# EAGLE board proto_shield_v5 (EAGLE 4.13)
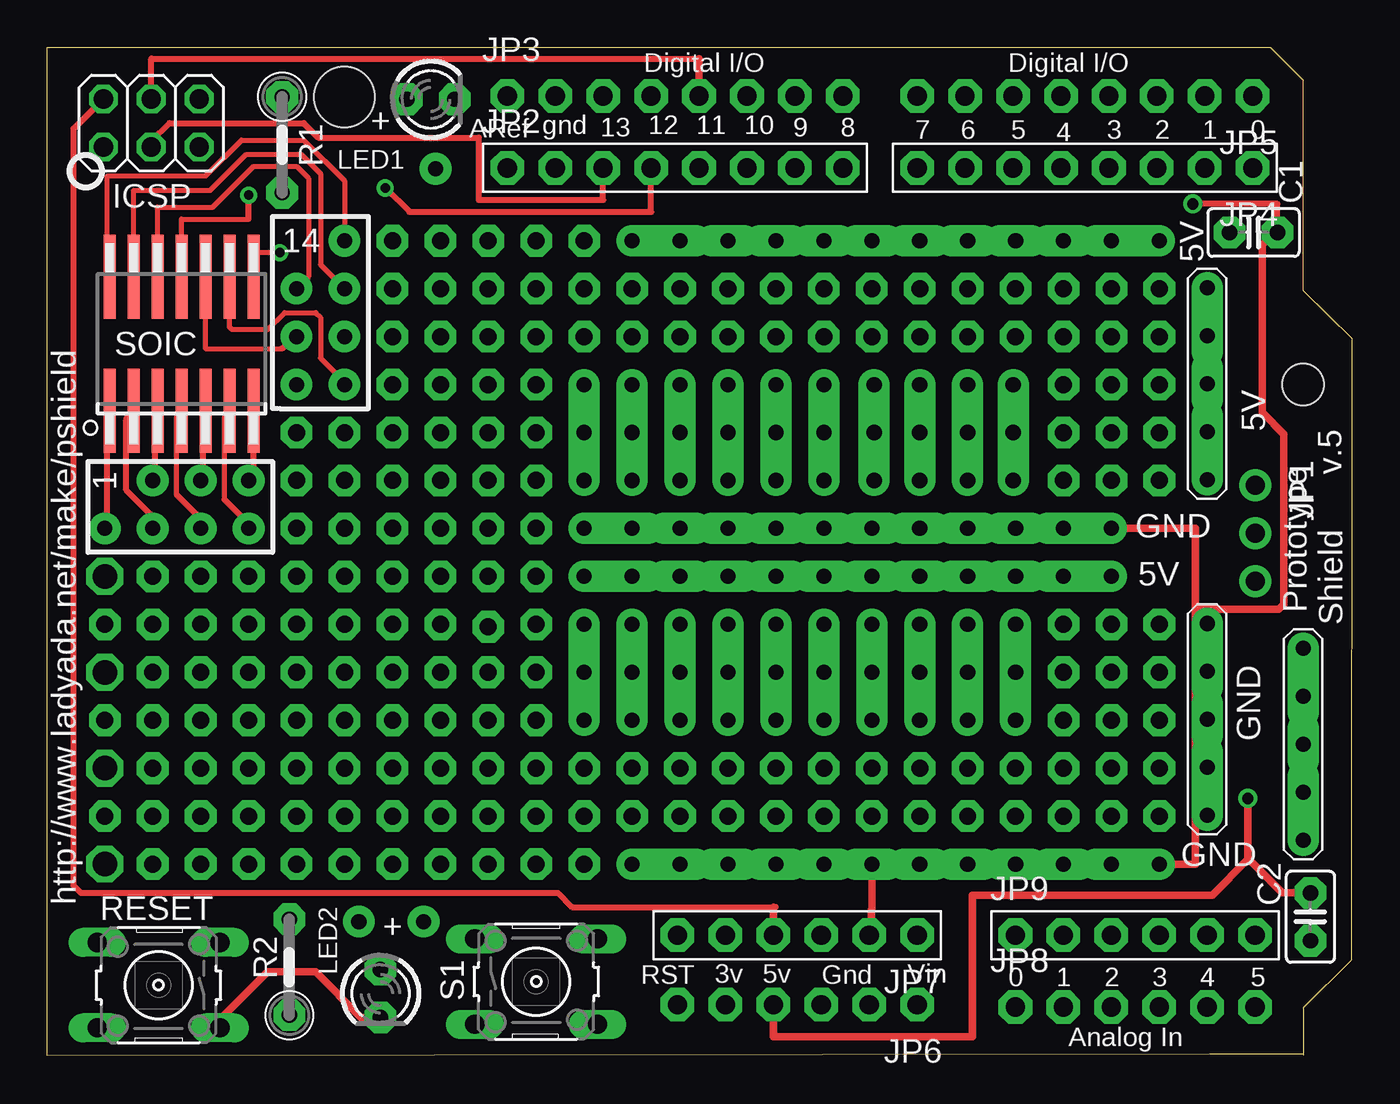
[diagram p0: board, top side]
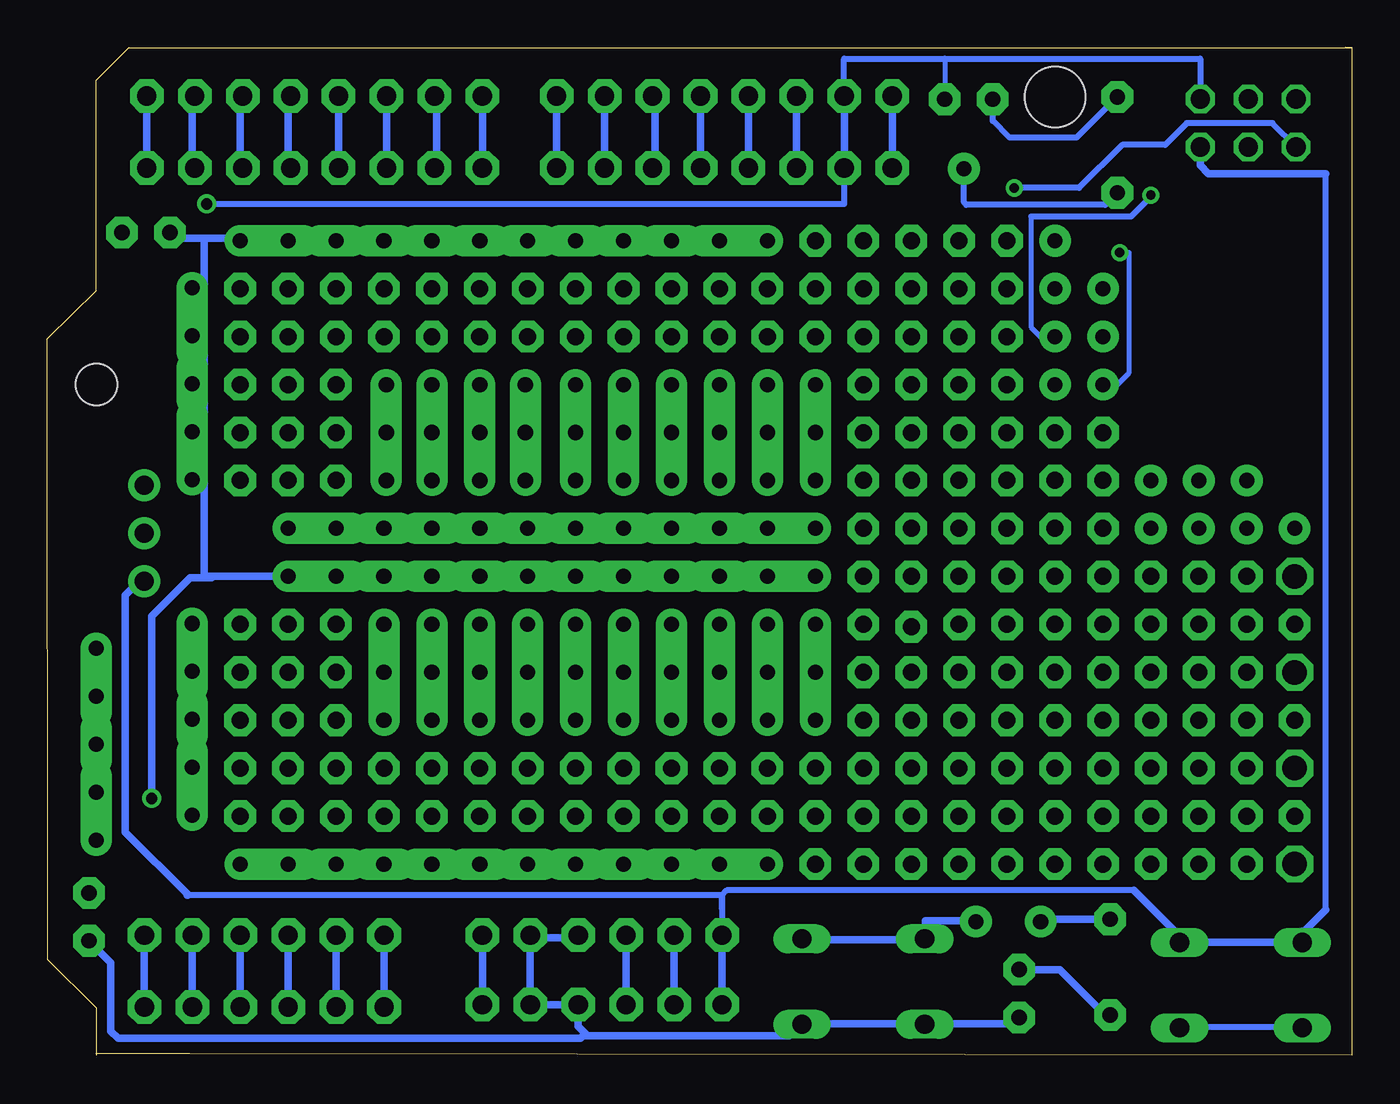
[diagram p1: board, bottom side, seen from below]

Size 69.16 x 53.39 mm. Coordinates in mm from the lower left corner, seen from the top.
Outline: 0,53.35 64.83,53.35 66.55,51.63 66.55,40.49 69.16,37.95 69.13,5.05
Outline: 0,53.35 0.38,53.39
Outline: 69.13,5.05 69.13,5.05
Outline: 69.13,5.05 66.55,2.5 66.57,0
Outline: 0,53.35 0,0 61.6,0.09 66.58,0.08
Copper layers (1*16): Top 0.035mm / dielectric 1.5mm / Bottom 0.035mm
Design rules "default": minimum track width 10mil, minimum drill 19mil, track to track 10mil, track to pad 10mil, pad to pad 0mil, via to via 10mil, smd to smd 0mil, copper to edge 10mil, drill to drill 8mil, minimum pad ring 10mil, minimum via ring 8mil, stop-mask expansion 4mil, vias tented up to drill 0mil, thermal gap 10mil
Holes 3.2 mm at 15.75,50.76
Holes 2.2 mm at 66.55,35.52

## Footprints (pad centres in the part's own frame; a part is rotated, then mirrored left to right if it is on the bottom)
C025-025X050 = drill 0.813 pad 1.676 octagon: 1 -1.27,0; 2 1.27,0
12-STRIP = drill 0.8 pad 1.676 offset: P$1 0,0; P$11 27.94,0 | drill 0.8 pad 1.676 long: P$2 2.54,0; P$3 5.08,0; P$4 7.62,0; P$5 10.16,0; P$6 12.7,0; P$7 15.24,0; P$8 17.78,0; P$9 20.32,0; P$10 22.86,0; P$12 25.4,0
SO-14NMW = smd 0.635 x 4.445: P$1 -3.048,-3.683; P$2 -1.778,-3.683; P$3 -0.508,-3.683; P$4 0.762,-3.683; P$5 2.032,-3.683; P$6 3.302,-3.683; P$7 4.572,-3.683; P$8 4.572,3.429; P$9 3.302,3.429; P$10 2.032,3.429; P$11 0.762,3.429; P$12 -0.508,3.429; P$13 -1.778,3.429; P$14 -3.048,3.429
2X03 = drill 1.016 octagon: 1 -2.54,-1.27; 2 -2.54,1.27; 3 0,-1.27; 4 0,1.27; 5 2.54,-1.27; 6 2.54,1.27
1X03-CLEANBIG = drill 1.016 pad 1.676 round: 1 -2.54,0; 2 0,0; 3 2.54,0
1X08-BIG = drill 1.016 pad 1.778 octagon: 1 -8.89,0; 2 -6.35,0; 3 -3.81,0; 4 -1.27,0; 5 1.27,0; 6 3.81,0; 7 6.35,0; 8 8.89,0
1X08-CLEANBIG = drill 1.016 pad 1.778 octagon: 1 -8.89,0; 2 -6.35,0; 3 -3.81,0; 4 -1.27,0; 5 1.27,0; 6 3.81,0; 7 6.35,0; 8 8.89,0
1X06-CLEANBIG = drill 1.016 pad 1.778 octagon: 1 -6.35,0; 2 -3.81,0; 3 -1.27,0; 4 1.27,0; 5 3.81,0; 6 6.35,0
1X06-BIG = drill 1.016 pad 1.778 octagon: 1 -6.35,0; 2 -3.81,0; 3 -1.27,0; 4 1.27,0; 5 3.81,0; 6 6.35,0
LED3MM = drill 0.813 pad 1.676 octagon: A -1.27,0; K 1.27,0
0207/5V = drill 0.813 pad 1.676 octagon: 1 -2.54,0; 2 2.54,0
B3F-10XX = drill 1.016 long: 1 -3.251,2.261; 2 3.251,2.261; 3 -3.251,-2.261; 4 3.251,-2.261
5-STRIP = drill 0.8 pad 1.676 long: P$1 2.54,0; P$2 5.08,0; P$5 7.62,0 | drill 0.8 pad 1.676 offset: P$3 0,0; P$4 10.16,0
PERFHOLE = drill 0.8 pad 1.676 round: P$1 0,0
3-STRIP = drill 0.8 pad 1.676 offset: 1 -2.54,0; P$5 2.54,0 | drill 0.8 pad 1.676 long: P$6 0,0

## Placement (x,y rotation side)
C1  [C025-025X050]  63.92,43.58 0 top
C2  [C025-025X050]  66.94,7.33 270 top
GNDSTRIP1  12-STRIP  [12-STRIP]  56.39,27.9 180 top
GNDSTRIP2  12-STRIP  [12-STRIP]  58.93,10.12 180 top
IC1  SMD-14  [SO-14NMW]  6.36,37.81 0 top
ICSP  [2X03]  5.52,49.38 0 top
JP1  [1X03-CLEANBIG]  64.01,27.65 270 top
JP2  [1X08-BIG]  33.27,47 0 top
JP3  [1X08-CLEANBIG]  33.27,50.81 0 top
JP4  [1X08-BIG]  54.99,47 180 top
JP5  [1X08-CLEANBIG]  54.99,50.81 180 top
JP6  [1X06-CLEANBIG]  39.75,2.67 180 top
JP7  [1X06-BIG]  39.75,6.36 180 top
JP8  [1X06-CLEANBIG]  57.65,2.55 0 top
JP9  [1X06-BIG]  57.65,6.36 0 top
LED1  [LED3MM]  20.33,50.63 0 top
LED2  [LED3MM]  17.66,3.26 270 top
R1  [0207/5V]  12.45,48.22 270 top
R2  [0207/5V]  12.83,4.66 90 top
RESET  Reset  [B3F-10XX]  5.9,3.71 180 top
S1  Reset  [B3F-10XX]  25.91,3.9 0 top
U$1  5-STRIP  [5-STRIP]  66.55,11.39 90 top
U$2  PERF  [PERFHOLE]  3.05,27.9 0 top
U$4  PERF  [PERFHOLE]  16.52,7.07 0 top
U$5  3-STRIP  [3-STRIP]  48.77,20.28 90 top
U$6  PERF  [PERFHOLE]  5.59,27.9 0 top
U$7  PERF  [PERFHOLE]  20.58,46.95 0 top
U$8  PERF  [PERFHOLE]  5.59,30.44 0 top
U$9  PERF  [PERFHOLE]  8.13,27.9 0 top
U$10  3-STRIP  [3-STRIP]  46.23,32.98 90 top
U$11  3-STRIP  [3-STRIP]  46.23,20.28 90 top
U$12  3-STRIP  [3-STRIP]  48.77,32.98 90 top
U$13  3-STRIP  [3-STRIP]  51.19,32.98 90 top
U$14  3-STRIP  [3-STRIP]  51.31,20.28 90 top
U$15  3-STRIP  [3-STRIP]  43.82,32.98 90 top
U$16  PERF  [PERFHOLE]  19.95,7.07 0 top
U$17  3-STRIP  [3-STRIP]  28.45,32.98 90 top
U$18  3-STRIP  [3-STRIP]  30.99,20.28 90 top
U$19  PERF  [PERFHOLE]  8.13,30.44 0 top
U$20  3-STRIP  [3-STRIP]  33.53,32.98 90 top
U$21  3-STRIP  [3-STRIP]  38.61,32.98 90 top
U$22  3-STRIP  [3-STRIP]  36.07,20.28 90 top
U$23  3-STRIP  [3-STRIP]  38.61,20.28 90 top
U$25  PERF  [PERFHOLE]  10.67,27.9 0 top
U$26  3-STRIP  [3-STRIP]  28.45,20.28 90 top
U$27  PERF  [PERFHOLE]  10.67,30.44 0 top
U$28  3-STRIP  [3-STRIP]  41.15,32.98 90 top
U$29  3-STRIP  [3-STRIP]  30.99,32.98 90 top
U$30  3-STRIP  [3-STRIP]  36.07,32.98 90 top
U$31  3-STRIP  [3-STRIP]  33.53,20.28 90 top
U$32  3-STRIP  [3-STRIP]  43.69,20.28 90 top
U$33  3-STRIP  [3-STRIP]  41.15,20.28 90 top
U$34  PERF  [PERFHOLE]  13.21,35.52 90 top
U$35  PERF  [PERFHOLE]  15.75,35.52 90 top
U$36  5-STRIP  [5-STRIP]  61.46,30.49 90 top
U$37  PERF  [PERFHOLE]  13.21,38.06 90 top
U$38  PERF  [PERFHOLE]  15.75,38.06 90 top
U$39  PERF  [PERFHOLE]  13.21,40.6 90 top
U$40  PERF  [PERFHOLE]  15.75,40.6 90 top
U$41  PERF  [PERFHOLE]  15.75,43.14 90 top
U$42  5-STRIP  [5-STRIP]  61.46,12.71 90 top
VCCSTRIP1  12-STRIP  [12-STRIP]  58.93,43.14 180 top
VCCSTRIP2  12-STRIP  [12-STRIP]  56.39,25.36 180 top

## Library data of the parts
C1 C2 R1 R2 = rcl-ez
GNDSTRIP1 GNDSTRIP2 U$1 U$5 U$10-U$15 U$17 U$18 U$20-U$23 U$26 U$28-U$33 U$36 U$42 VCCSTRIP1 VCCSTRIP2 = Atmex
IC1 JP1-JP9 U$2 U$4 U$6-U$9 U$16 U$19 U$25 U$27 U$34 U$35 U$37-U$41 = carduino
ICSP = pinhead
LED1 LED2 = minimidi
RESET S1 = switch-omron

## Nets
3.3V: JP6.5 JP7.5
+5V: C1.1 C2.1 ICSP.2 JP6.4 JP7.4 U$36.P$3 VCCSTRIP1.P$1 VCCSTRIP2.P$1
GND: C1.2 C2.2 GNDSTRIP1.P$1 GNDSTRIP2.P$1 ICSP.6 JP2.2 JP3.2 JP6.2 JP6.3 JP7.2 JP7.3 LED1.K LED2.K RESET.1 RESET.2 S1.3 S1.4 U$42.P$3
N$2: ICSP.3 JP2.3 JP3.3
N$4: ICSP.1 JP2.4 JP3.4
N$5: ICSP.4 JP2.5 JP3.5
N$8: LED1.A R1.1
N$15: JP6.1 JP7.1
N$16: R1.2 U$7.P$1
N$40: R2.2 U$4.P$1
N$41: LED2.A R2.1
N$126: IC1.P$1 U$2.P$1
N$127: IC1.P$2 U$6.P$1
N$135: JP2.8 JP3.8
N$145: JP2.7 JP3.7
N$149: IC1.P$3 U$8.P$1
N$150: IC1.P$4 U$9.P$1
N$151: IC1.P$5 U$19.P$1
N$152: JP2.6 JP3.6
N$153: JP2.1 JP3.1
N$154: JP8.1 JP9.1
N$155: IC1.P$6 U$25.P$1
N$156: IC1.P$7 U$27.P$1
N$157: IC1.P$8 U$34.P$1
N$158: IC1.P$9 U$35.P$1
N$159: IC1.P$10 U$37.P$1
N$164: JP8.2 JP9.2
N$165: IC1.P$11 U$38.P$1
N$166: IC1.P$12 U$39.P$1
N$167: IC1.P$13 U$40.P$1
N$178: IC1.P$14 U$41.P$1
N$181: JP8.3 JP9.3
N$182: JP8.4 JP9.4
N$183: JP8.5 JP9.5
N$184: JP8.6 JP9.6
N$185: JP4.1 JP5.1
N$186: JP4.2 JP5.2
N$187: JP4.3 JP5.3
N$188: JP4.4 JP5.4
N$189: JP4.5 JP5.5
N$190: JP4.6 JP5.6
N$191: JP4.7 JP5.7
N$192: JP4.8 JP5.8
N$194: S1.1 S1.2 U$16.P$1
RESET: ICSP.5 JP1.3 JP6.6 JP7.6 RESET.3 RESET.4

## Tracks (layer width: path | path; a pad name or v marks a point on that pad's centre or on a via)
3.3V
  Bottom 0.406: JP6.5 35.94,2.8 | 35.94,2.8 JP7.5 | 35.94,2.8 35.81,2.8
+5V  (via drill 0.6)
  Top 0.305: ICSP.2 1.4,49.07 1.4,8.98 1.78,8.6 27.06,8.6 27.82,7.83 38.48,7.83 38.61,7.83 | 38.49,0.98 38.48,0.99 38.48,1.28
  Top 0.406: 38.49,0.98 49.03,0.98 49.03,8.47 61.73,8.47 63.62,10.36 63.62,10.42 | JP6.4 38.48,1.28 38.48,1.11 | 38.48,7.83 JP7.4 | 63.62,10.42 v63.62,13.59 | C2.1 65.45,8.6 63.62,10.42
  Bottom 0.305: 60.84,25.36 60.84,30.49 U$36.P$3
  Bottom 0.406: 60.45,25.36 VCCSTRIP2.P$1 | 60.45,25.36 60.84,25.36 60.84,43.27 | 58.55,43.27 VCCSTRIP1.P$1 | 60.84,43.27 58.55,43.27 | 58.55,43.27 58.81,43.01 | 60.84,43.27 62.36,43.27 C1.1 | JP7.4 38.48,6.23 | 38.48,6.23 JP6.4 | 38.48,6.23 38.35,6.23 | v63.62,13.59 63.62,23.25 61.59,25.28 60.45,25.28 60.45,25.36
GND  (via drill 0.6)
  Top 0.305: 58.81,10.25 58.81,10.5 | GNDSTRIP2.P$1 58.81,10.25 | 58.81,10.25 58.81,9.74 | 60.46,45.04 60.46,45.09 v60.7,45.09 65.19,45.09 C1.2 | U$42.P$3 61.08,13.09 61.08,13.59
  Top 0.406: 59.06,10.12 59.19,10.12 | 59.19,10.12 60.84,10.12 | 59.19,10.12 59.19,9.99 | GNDSTRIP1.P$1 60.84,27.9 60.84,23.63 | LED2.K 16.64,1.99 14.23,4.4 11.69,4.4 9.15,1.86 RESET.1 | 60.46,45.04 60.84,45.04 | 60.84,10.12 60.84,23.63 | 59.06,10.12 GNDSTRIP2.P$1 | 59.06,10.12 43.69,10.12 43.69,7.71 43.68,7.7 43.68,6.48 JP7.2 | 60.84,10.12 60.84,13.59 61.08,13.59 61.16,13.59 | C1.2 65.19,43.65 65.15,43.69 64.39,42.93 64.39,34.04 65.53,32.9 65.53,23.88 65.27,23.63 60.84,23.63
  Bottom 0.254: 21.6,52.79 LED1.K
  Bottom 0.305: ICSP.6 8.06,52.79 21.6,52.79 26.93,52.79 26.93,51.01 26.86,51.01 26.8,51.01 | 2.67,1.45 2.76,1.48 9.06,1.48 RESET.1 9.31,1.99 | JP2.2 26.92,45.09 v60.7,45.09
  Bottom 0.406: 2.67,1.48 2.67,1.45 RESET.2 | 22.66,1.66 22.73,1.66 | LED2.K 17.66,1.66 22.66,1.66 | 29.17,1.66 29.21,1.66 29.84,1.02 40.51,1.02 40.57,1.08 | 29.17,1.66 S1.4 | 22.66,1.66 S1.3 | 22.66,1.66 29.17,1.66 | JP2.2 JP3.2 26.92,50.95 26.86,51.01 | 43.56,6.23 JP6.2 JP6.3 41.02,1.53 40.57,1.08 | 43.56,6.23 JP7.2 | JP7.3 41.02,6.23 43.56,6.23 | C2.2 65.78,4.9 65.78,1.28 65.4,0.89 40.89,0.89 40.76,1.02 40.64,1.02 40.57,1.08
N$1  (via drill 0.9 pad 1.68)
  other vias: 58.93,30.44
N$2
  Top 0.254: ICSP.3 5.52,48.4
  Top 0.305: 29.46,45.3 22.87,45.3 22.87,48.6 14.36,48.6 13.6,49.36 6.48,49.36 5.52,48.4 | 29.46,45.3 29.47,45.3 | 29.46,45.3 JP2.3
  Bottom 0.406: JP2.3 JP3.3
N$3  (via drill 0.9 pad 1.68)
  other vias: 13.21,32.98
N$4  (via drill 0.5 pad 0.25)
  Top 0.305: 32,44.66 19.2,44.66 17.9,45.96 | 17.9,45.96 17.9,45.94 v17.91,45.93 | 17.9,45.96 17.9,45.98 | 32,44.66 32.01,44.66 | 32,44.66 JP2.4
  Bottom 0.305: ICSP.1 4.23,49.36 8.77,49.36 9.91,48.22 12.2,48.22 14.48,45.93 v17.91,45.93
  Bottom 0.406: JP2.4 JP3.4
N$5
  Top 0.305: ICSP.4 5.52,52.79 34.55,52.79
  Top 0.406: 34.55,52.79 34.54,52.78 JP3.5
  Bottom 0.406: JP3.5 JP2.5
N$6  (via drill 0.9 pad 1.68)
  other vias: 13.21,30.44
N$7  (via drill 0.9 pad 1.68)
  other vias: 13.21,27.9
N$8
  Bottom 0.305: R1.1 14.61,48.6 18.17,48.6 19.06,49.49 LED1.A 19.06,50.89
N$9  (via drill 1.3)
  other vias: 3.05,25.36
N$10  (via drill 0.9 pad 1.68)
  other vias: 3.05,22.82
N$11  (via drill 0.9 pad 1.68)
  other vias: 36.07,12.66
N$12  (via drill 0.9 pad 1.68)
  other vias: 36.07,15.2
N$13  (via drill 0.9 pad 1.68)
  other vias: 36.07,38.06
N$14  (via drill 0.9 pad 1.68)
  other vias: 36.07,40.6
N$15
  Bottom 0.406: JP6.1 JP7.1
N$16
  Bottom 0.305: R1.2 13.09,45.04 20.45,45.04 20.58,45.17 U$7.P$1
N$17  (via drill 0.9 pad 1.68)
  other vias: 8.13,25.36
N$18  (via drill 0.9 pad 1.68)
  other vias: 8.13,22.82
N$19  (via drill 0.9 pad 1.68)
  other vias: 8.13,20.28
N$20  (via drill 0.9 pad 1.68)
  other vias: 25.91,10.12
N$21  (via drill 0.9 pad 1.68)
  other vias: 23.37,10.12
N$22  (via drill 0.9 pad 1.68)
  other vias: 28.45,10.12
N$23  (via drill 0.9 pad 1.68)
  other vias: 8.13,10.12
N$24  (via drill 0.9 pad 1.68)
  other vias: 10.67,10.12
N$25  (via drill 0.9 pad 1.68)
  other vias: 23.37,30.44
N$26  (via drill 0.9 pad 1.68)
  other vias: 23.37,32.98
N$27  (via drill 0.9 pad 1.68)
  other vias: 23.37,35.52
N$28  (via drill 0.9 pad 1.68)
  other vias: 25.91,30.44
N$29  (via drill 0.9 pad 1.68)
  other vias: 25.91,32.98
N$30  (via drill 0.9 pad 1.68)
  other vias: 33.53,12.66
N$31  (via drill 0.9 pad 1.68)
  other vias: 33.53,15.2
N$32  (via drill 0.9 pad 1.68)
  other vias: 33.53,38.06
N$33  (via drill 0.9 pad 1.68)
  other vias: 33.53,40.6
N$34  (via drill 0.9 pad 1.68)
  other vias: 18.29,10.12
N$35  (via drill 0.9 pad 1.68)
  other vias: 25.91,35.52
N$36  (via drill 0.9 pad 1.68)
  other vias: 23.37,17.74
N$37  (via drill 0.9 pad 1.68)
  other vias: 23.37,20.28
N$38  (via drill 0.9 pad 1.68)
  other vias: 10.67,22.82
N$39  (via drill 0.9 pad 1.68)
  other vias: 10.67,25.36
N$40
  Bottom 0.406: U$4.P$1 16.52,7.2 R2.2
N$41
  Bottom 0.406: R2.1 12.96,1.99 15.5,4.53 LED2.A
N$42  (via drill 1.3)
  other vias: 3.05,20.28
N$43  (via drill 0.9 pad 1.68)
  other vias: 5.59,22.82
N$44  (via drill 0.9 pad 1.68)
  other vias: 5.59,25.36
N$46  (via drill 0.9 pad 1.68)
  other vias: 38.61,12.66
N$47  (via drill 0.9 pad 1.68)
  other vias: 38.61,15.2
N$48  (via drill 0.9 pad 1.68)
  other vias: 10.67,20.28
N$49  (via drill 0.9 pad 1.68)
  other vias: 20.83,10.12
N$50  (via drill 0.9 pad 1.68)
  other vias: 13.21,10.12
N$51  (via drill 0.9 pad 1.68)
  other vias: 13.21,20.28
N$52  (via drill 0.9 pad 1.68)
  other vias: 13.21,22.82
N$53  (via drill 0.9 pad 1.68)
  other vias: 13.21,25.36
N$60  (via drill 0.9 pad 1.68)
  other vias: 41.15,12.66
N$61  (via drill 0.9 pad 1.68)
  other vias: 15.75,10.12
N$62  (via drill 0.9 pad 1.68)
  other vias: 25.91,43.14
N$63  (via drill 0.9 pad 1.68)
  other vias: 23.37,43.14
N$64  (via drill 0.9 pad 1.68)
  other vias: 41.15,15.2
N$65  (via drill 0.9 pad 1.68)
  other vias: 41.15,38.06
N$66  (via drill 0.9 pad 1.68)
  other vias: 41.15,40.6
N$67  (via drill 0.9 pad 1.68)
  other vias: 28.45,43.14
N$68  (via drill 0.9 pad 1.68)
  other vias: 38.61,38.06
N$69  (via drill 0.9 pad 1.68)
  other vias: 38.61,40.6
N$71  (via drill 0.9 pad 1.68)
  other vias: 18.29,30.44
N$72  (via drill 0.9 pad 1.68)
  other vias: 18.29,32.98
N$73  (via drill 0.9 pad 1.68)
  other vias: 18.29,35.52
N$74  (via drill 0.9 pad 1.68)
  other vias: 18.29,38.06
N$75  (via drill 0.9 pad 1.68)
  other vias: 18.29,40.6
N$76  (via drill 0.9 pad 1.68)
  other vias: 46.23,12.66
N$77  (via drill 0.9 pad 1.68)
  other vias: 46.23,15.2
N$78  (via drill 0.9 pad 1.68)
  other vias: 46.23,38.06
N$79  (via drill 0.9 pad 1.68)
  other vias: 46.23,40.6
N$80  (via drill 0.9 pad 1.68)
  other vias: 5.59,20.28
N$81  (via drill 0.9 pad 1.68)
  other vias: 18.29,27.9
N$82  (via drill 0.9 pad 1.68)
  other vias: 18.29,25.36
N$83  (via drill 0.9 pad 1.68)
  other vias: 18.29,22.82
N$84  (via drill 0.9 pad 1.68)
  other vias: 18.29,20.28
N$85  (via drill 0.9 pad 1.68)
  other vias: 18.29,43.14
N$86  (via drill 0.9 pad 1.68)
  other vias: 20.83,43.14
N$87  (via drill 0.9 pad 1.68)
  other vias: 23.37,22.69
N$90  (via drill 0.9 pad 1.68)
  other vias: 15.75,30.44
N$91  (via drill 0.9 pad 1.68)
  other vias: 15.75,32.98
N$95  (via drill 0.9 pad 1.68)
  other vias: 43.69,12.66
N$96  (via drill 0.9 pad 1.68)
  other vias: 43.69,15.2
N$97  (via drill 0.9 pad 1.68)
  other vias: 43.69,38.06
N$98  (via drill 0.9 pad 1.68)
  other vias: 43.69,40.6
N$99  (via drill 0.9 pad 1.68)
  other vias: 15.75,20.28
N$100  (via drill 0.9 pad 1.68)
  other vias: 15.75,27.9
N$101  (via drill 0.9 pad 1.68)
  other vias: 15.75,25.36
N$102  (via drill 0.9 pad 1.68)
  other vias: 15.75,22.82
N$103  (via drill 0.9 pad 1.68)
  other vias: 20.83,22.82
N$104  (via drill 0.9 pad 1.68)
  other vias: 20.83,25.36
N$105  (via drill 0.9 pad 1.68)
  other vias: 20.83,27.9
N$106  (via drill 0.9 pad 1.68)
  other vias: 20.83,30.44
N$107  (via drill 0.9 pad 1.68)
  other vias: 20.83,32.98
N$108  (via drill 0.9 pad 1.68)
  other vias: 20.83,35.52
N$109  (via drill 0.9 pad 1.68)
  other vias: 20.83,38.06
N$110  (via drill 0.9 pad 1.68)
  other vias: 20.83,40.6
N$111  (via drill 0.9 pad 1.68)
  other vias: 48.77,12.66
N$112  (via drill 0.9 pad 1.68)
  other vias: 48.77,15.2
N$113  (via drill 0.9 pad 1.68)
  other vias: 20.83,20.28
N$114  (via drill 0.9 pad 1.68)
  other vias: 3.05,17.74
N$118  (via drill 1.3 pad 1.68)
  other vias: 3.05,15.2
N$119  (via drill 0.9 pad 1.68)
  other vias: 3.05,12.66
N$120  (via drill 0.9 pad 1.68)
  other vias: 5.59,15.2
N$121  (via drill 0.9 pad 1.68)
  other vias: 5.59,17.74
N$122  (via drill 0.9 pad 1.68)
  other vias: 5.59,12.66
N$123  (via drill 1.3)
  other vias: 3.05,10.12
N$124  (via drill 0.9 pad 1.68)
  other vias: 5.59,10.12
N$125  (via drill 0.9 pad 1.68)
  other vias: 51.31,12.66
N$126
  Top 0.305: U$2.P$1 3.18,27.9 3.18,33.89 arc-45 3.26,34.07 IC1.P$1
N$127
  Top 0.305: IC1.P$2 4.27,33.82 arc45 4.2,33.64 4.2,29.93 5.52,28.61 arc-45 5.59,28.43 U$6.P$1
N$128  (via drill 0.9 pad 1.68)
  other vias: 58.93,32.98
N$129  (via drill 0.9 pad 1.68)
  other vias: 51.31,15.2
N$130  (via drill 0.9 pad 1.68)
  other vias: 51.31,38.06
N$131  (via drill 0.9 pad 1.68)
  other vias: 51.31,40.6
N$132  (via drill 0.9 pad 1.68)
  other vias: 58.93,35.52
N$133  (via drill 0.9 pad 1.68)
  other vias: 48.77,38.06
N$134  (via drill 0.9 pad 1.68)
  other vias: 48.77,40.6
N$135
  Bottom 0.406: JP2.8 JP3.8
N$136  (via drill 0.9 pad 1.68)
  other vias: 58.93,17.74
N$137  (via drill 0.9 pad 1.68)
  other vias: 58.93,20.28
N$138  (via drill 0.9 pad 1.68)
  other vias: 53.85,30.44
N$139  (via drill 0.9 pad 1.68)
  other vias: 53.85,32.98
N$140  (via drill 0.9 pad 1.68)
  other vias: 53.85,35.52
N$141  (via drill 0.9 pad 1.68)
  other vias: 56.39,12.66
N$142  (via drill 0.9 pad 1.68)
  other vias: 56.39,15.2
N$143  (via drill 0.9 pad 1.68)
  other vias: 56.39,38.06
N$144  (via drill 0.9 pad 1.68)
  other vias: 56.39,40.6
N$145
  Bottom 0.406: JP2.7 JP3.7
N$146  (via drill 0.9 pad 1.68)
  other vias: 53.85,22.82
N$147  (via drill 0.9 pad 1.68)
  other vias: 53.85,20.28
N$148  (via drill 0.9 pad 1.68)
  other vias: 53.85,17.74
N$149
  Top 0.305: U$8.P$1 5.72,30.44 5.72,33.89 arc-45 5.8,34.07 IC1.P$3
N$150
  Top 0.254: 6.94,33.94 arc45 6.86,33.76 6.86,29.68
  Top 0.305: 6.94,33.94 IC1.P$4 | 6.86,29.68 8.06,28.48 arc-45 8.13,28.3 U$9.P$1
N$151
  Top 0.305: U$19.P$1 8.26,30.44 8.26,33.89 arc-45 8.34,34.07 IC1.P$5
N$152
  Bottom 0.406: JP3.6 36.95,50.81 36.95,47 JP2.6
N$153
  Bottom 0.406: JP2.1 JP3.1
N$154
  Bottom 0.406: JP8.1 JP9.1
N$155
  Top 0.254: IC1.P$6 9.48,33.94 arc45 9.4,33.76 9.4,29.42
  Top 0.305: 9.4,29.42 10.6,28.23 arc-45 10.67,28.05 U$25.P$1
N$156
  Top 0.254: 10.88,30.37 10.93,30.31
  Top 0.305: 10.88,30.37 arc45 10.7,30.44 U$27.P$1 | 10.93,30.31 IC1.P$7
N$157  (via drill 0.5)
  Top 0.254: IC1.P$8 10.93,42.5 v12.33,42.5
  Bottom 0.254: v12.33,42.5 11.82,42.5 11.82,36.15 12.45,35.52 U$34.P$1 13.34,35.52
N$158
  Top 0.254: IC1.P$9 9.66,38.57 9.79,38.44 11.69,38.44 12.58,39.33 14.23,39.33 14.48,39.08 14.48,36.92 15.75,35.65 15.88,35.65 U$35.P$1
N$159
  Top 0.254: IC1.P$10 8.39,37.42 12.44,37.42
  Top 0.305: 13.26,38.11 13.33,38.11 | 13.26,38.11 U$37.P$1 | 12.44,37.42 13.12,38.11 13.26,38.11
N$160  (via drill 0.9 pad 1.68)
  other vias: 53.85,12.66
N$161  (via drill 0.9 pad 1.68)
  other vias: 53.85,15.2
N$162  (via drill 0.9 pad 1.68)
  other vias: 53.85,38.06
N$163  (via drill 0.9 pad 1.68)
  other vias: 53.85,40.6
N$164
  Bottom 0.406: JP8.2 JP9.2
N$165  (via drill 0.5)
  Top 0.254: IC1.P$11 7.12,44.28 10.67,44.28
  Top 0.305: 10.67,45.59 v10.67,45.55 | 10.67,44.28 10.67,45.59 | 10.67,45.59 10.66,45.6
  Bottom 0.254: v10.67,45.55 10.66,45.55 10.66,45.47 | 17.02,44.41 17.02,38.57 16.52,38.06 U$38.P$1
  Bottom 0.305: v10.67,45.55 10.67,45.48 10.66,45.47 11.73,44.41 17.02,44.41
N$166
  Top 0.254: IC1.P$12 5.85,44.92 8.77,44.92 10.93,47.08 13.21,47.08 13.85,46.44 13.85,41.23 U$39.P$1
N$167
  Top 0.254: IC1.P$13 4.58,45.81 8.64,45.81 10.55,47.71 13.47,47.71 14.48,46.7 14.48,41.87 U$40.P$1 | U$40.P$1 15.88,40.6 | U$40.P$1
N$168  (via drill 0.9 pad 1.68)
  other vias: 56.39,17.74
N$169  (via drill 0.9 pad 1.68)
  other vias: 56.39,20.28
N$170  (via drill 0.9 pad 1.68)
  other vias: 56.39,22.82
N$171  (via drill 0.9 pad 1.68)
  other vias: 58.93,22.82
N$172  (via drill 0.9 pad 1.68)
  other vias: 25.91,27.9
N$173  (via drill 0.9 pad 1.68)
  other vias: 56.39,30.44
N$174  (via drill 0.9 pad 1.68)
  other vias: 56.39,32.98
N$175  (via drill 0.9 pad 1.68)
  other vias: 56.39,35.52
N$176  (via drill 0.9 pad 1.68)
  other vias: 58.93,12.66
N$177  (via drill 0.9 pad 1.68)
  other vias: 58.93,15.2
N$178
  Top 0.254: U$41.P$1 15.75,46.31 13.6,48.47 10.29,48.47 8.39,46.57 3.18,46.57 3.18,41.23 IC1.P$14
N$181
  Bottom 0.406: 56.38,6.61 JP9.3 | JP8.3 56.38,6.61 | 56.38,6.61 56.13,6.61
N$182
  Bottom 0.406: 58.92,6.23 JP9.4 | JP8.4 58.92,6.23 | 58.92,6.23 58.8,6.23
N$183
  Bottom 0.406: 61.46,6.48 JP9.5 | JP8.5 61.46,6.48 | 61.46,6.48 61.59,6.48
N$184
  Bottom 0.406: JP8.6 JP9.6
N$185
  Bottom 0.406: JP4.1 JP5.1
N$186
  Bottom 0.406: 61.46,50.81 61.46,50.93 | 61.46,50.81 JP5.2 | JP4.2 61.46,47 61.46,50.81
N$187
  Bottom 0.406: JP5.3 58.92,50.81 58.92,47 JP4.3
N$188
  Bottom 0.406: 56.38,50.81 56.38,51.06 | 56.38,50.81 JP5.4 | JP4.4 56.38,47 56.38,50.81
N$189
  Bottom 0.406: JP4.5 JP5.5
N$190
  Bottom 0.406: 51.18,50.93 JP5.6 JP4.6
N$191
  Bottom 0.406: 48.51,50.81 48.51,50.93 | 48.51,50.81 JP5.7 | JP4.7 48.51,47 48.51,50.81
N$192
  Bottom 0.406: 46.1,51.19 JP5.8 JP4.8
N$193  (via drill 0.9 pad 1.68)
  other vias: 25.91,25.36
N$194
  Bottom 0.305: 22.61,6.11 22.6,6.1 | 22.61,6.16 22.61,6.11 | 22.74,6.44 22.74,6.24 22.61,6.11
  Bottom 0.406: S1.2 29.17,6.1 22.66,6.1 S1.1 22.61,6.16 22.61,7.12 19.95,7.12 | 19.95,7.12 19.94,7.12 | U$16.P$1 19.95,7.12
N$195  (via drill 0.9 pad 1.68)
  other vias: 23.37,27.9
N$196  (via drill 0.9 pad 1.68)
  other vias: 23.37,25.36
N$198  (via drill 0.9 pad 1.68)
  other vias: 58.93,38.06
N$199  (via drill 0.9 pad 1.68)
  other vias: 58.93,40.6
N$206  (via drill 0.9 pad 1.68)
  other vias: 25.91,12.66
N$207  (via drill 0.9 pad 1.68)
  other vias: 25.91,15.2
N$208  (via drill 0.9 pad 1.68)
  other vias: 25.91,38.06
N$209  (via drill 0.9 pad 1.68)
  other vias: 25.91,40.6
N$210  (via drill 0.9 pad 1.68)
  other vias: 8.13,17.74
N$214  (via drill 0.9 pad 1.68)
  other vias: 8.13,15.2
N$215  (via drill 0.9 pad 1.68)
  other vias: 8.13,12.66
N$216  (via drill 0.9 pad 1.68)
  other vias: 25.91,17.74
N$217  (via drill 0.9 pad 1.68)
  other vias: 25.91,20.28
N$218  (via drill 0.9 pad 1.68)
  other vias: 10.67,15.2
N$219  (via drill 0.9 pad 1.68)
  other vias: 10.67,17.74
N$225  (via drill 0.9 pad 1.68)
  other vias: 23.37,12.66
N$226  (via drill 0.9 pad 1.68)
  other vias: 23.37,15.2
N$227  (via drill 0.9 pad 1.68)
  other vias: 23.37,38.06
N$228  (via drill 0.9 pad 1.68)
  other vias: 23.37,40.6
N$229  (via drill 0.9 pad 1.68)
  other vias: 10.67,12.66
N$241  (via drill 0.9 pad 1.68)
  other vias: 28.45,12.66
N$242  (via drill 0.9 pad 1.68)
  other vias: 28.45,15.2
N$255  (via drill 0.9 pad 1.68)
  other vias: 30.99,12.66
N$258  (via drill 0.9 pad 1.68)
  other vias: 13.21,15.2
N$259  (via drill 0.9 pad 1.68)
  other vias: 30.99,15.2
N$260  (via drill 0.9 pad 1.68)
  other vias: 30.99,38.06
N$261  (via drill 0.9 pad 1.68)
  other vias: 30.99,40.6
N$262  (via drill 0.9 pad 1.68)
  other vias: 13.21,17.74
N$263  (via drill 0.9 pad 1.68)
  other vias: 28.45,38.06
N$264  (via drill 0.9 pad 1.68)
  other vias: 28.45,40.6
N$265  (via drill 0.9 pad 1.68)
  other vias: 18.29,17.74
N$266  (via drill 0.9 pad 1.68)
  other vias: 18.29,15.2
N$267  (via drill 0.9 pad 1.68)
  other vias: 18.29,12.66
N$268  (via drill 0.9 pad 1.68)
  other vias: 15.75,17.74
N$269  (via drill 0.9 pad 1.68)
  other vias: 15.75,15.2
N$270  (via drill 0.9 pad 1.68)
  other vias: 20.83,15.2
N$271  (via drill 0.9 pad 1.68)
  other vias: 20.83,17.74
N$272  (via drill 0.9 pad 1.68)
  other vias: 20.83,12.66
N$273  (via drill 0.9 pad 1.68)
  other vias: 25.91,22.82
N$274  (via drill 0.9 pad 1.68)
  other vias: 13.21,12.66
N$275  (via drill 0.9 pad 1.68)
  other vias: 15.75,12.66
RESET
  Bottom 0.305: 11.56,8.72 33.15,8.72 33.4,8.48 33.4,8.39 | 64.01,25.36 JP1.3 | 61.73,8.47 33.41,8.47 33.4,7.72 33.4,8.39 | 1.4,7.71 1.4,46.7 | 33.41,6.82 33.4,6.83 33.4,8.39
  Bottom 0.406: 3.31,5.97 RESET.4 2.65,6.46 1.4,7.71 | 3.31,5.97 RESET.3 9.19,6.35 11.56,8.72 | 3.31,5.97 2.67,6.56 | ICSP.5 8.06,47.13 7.63,46.7 1.4,46.7 | 33.4,6.23 JP7.6 33.4,6.83 | 33.4,6.23 JP6.6 | 33.4,6.23 33.52,6.23 | 64.01,25.36 65.02,24.35 65.02,11.82 61.72,8.51 61.72,8.48 61.73,8.47

## Text on the board
tPlace: Digital I/O | Digital I/O | ARef | gnd | 13 | 12 | 11 | 10 | 9 | 8 | 7 | 6 | 5 | 3 | 2 | 1 | 0 | + | 4 | 5V | 14 | SOIC | 5V | v.5 | 1 | GND | 5V | Prototype | Shield | GND | GND | http://www.ladyada.net/make/pshield | + | RST | 3v | 5v | Vin | Gnd | 0 | 1 | 2 | 3 | 4 | 5 | Analog In